# Altium PCB dc_cdi_cx500.PcbDoc (part 2 of 2)
Units mm, origin at the board's own origin, x right, y up, seen from the top; angles counter-clockwise.
Board outline 71.5 x 82.28 mm, 4 copper layers (Top, Power Plane, Ground Plane, Bottom), stack 1.586 mm thick; 164 components, 99 nets, 484 pads, 295 vias.
Unrouted connection lines stored in the file: 68.
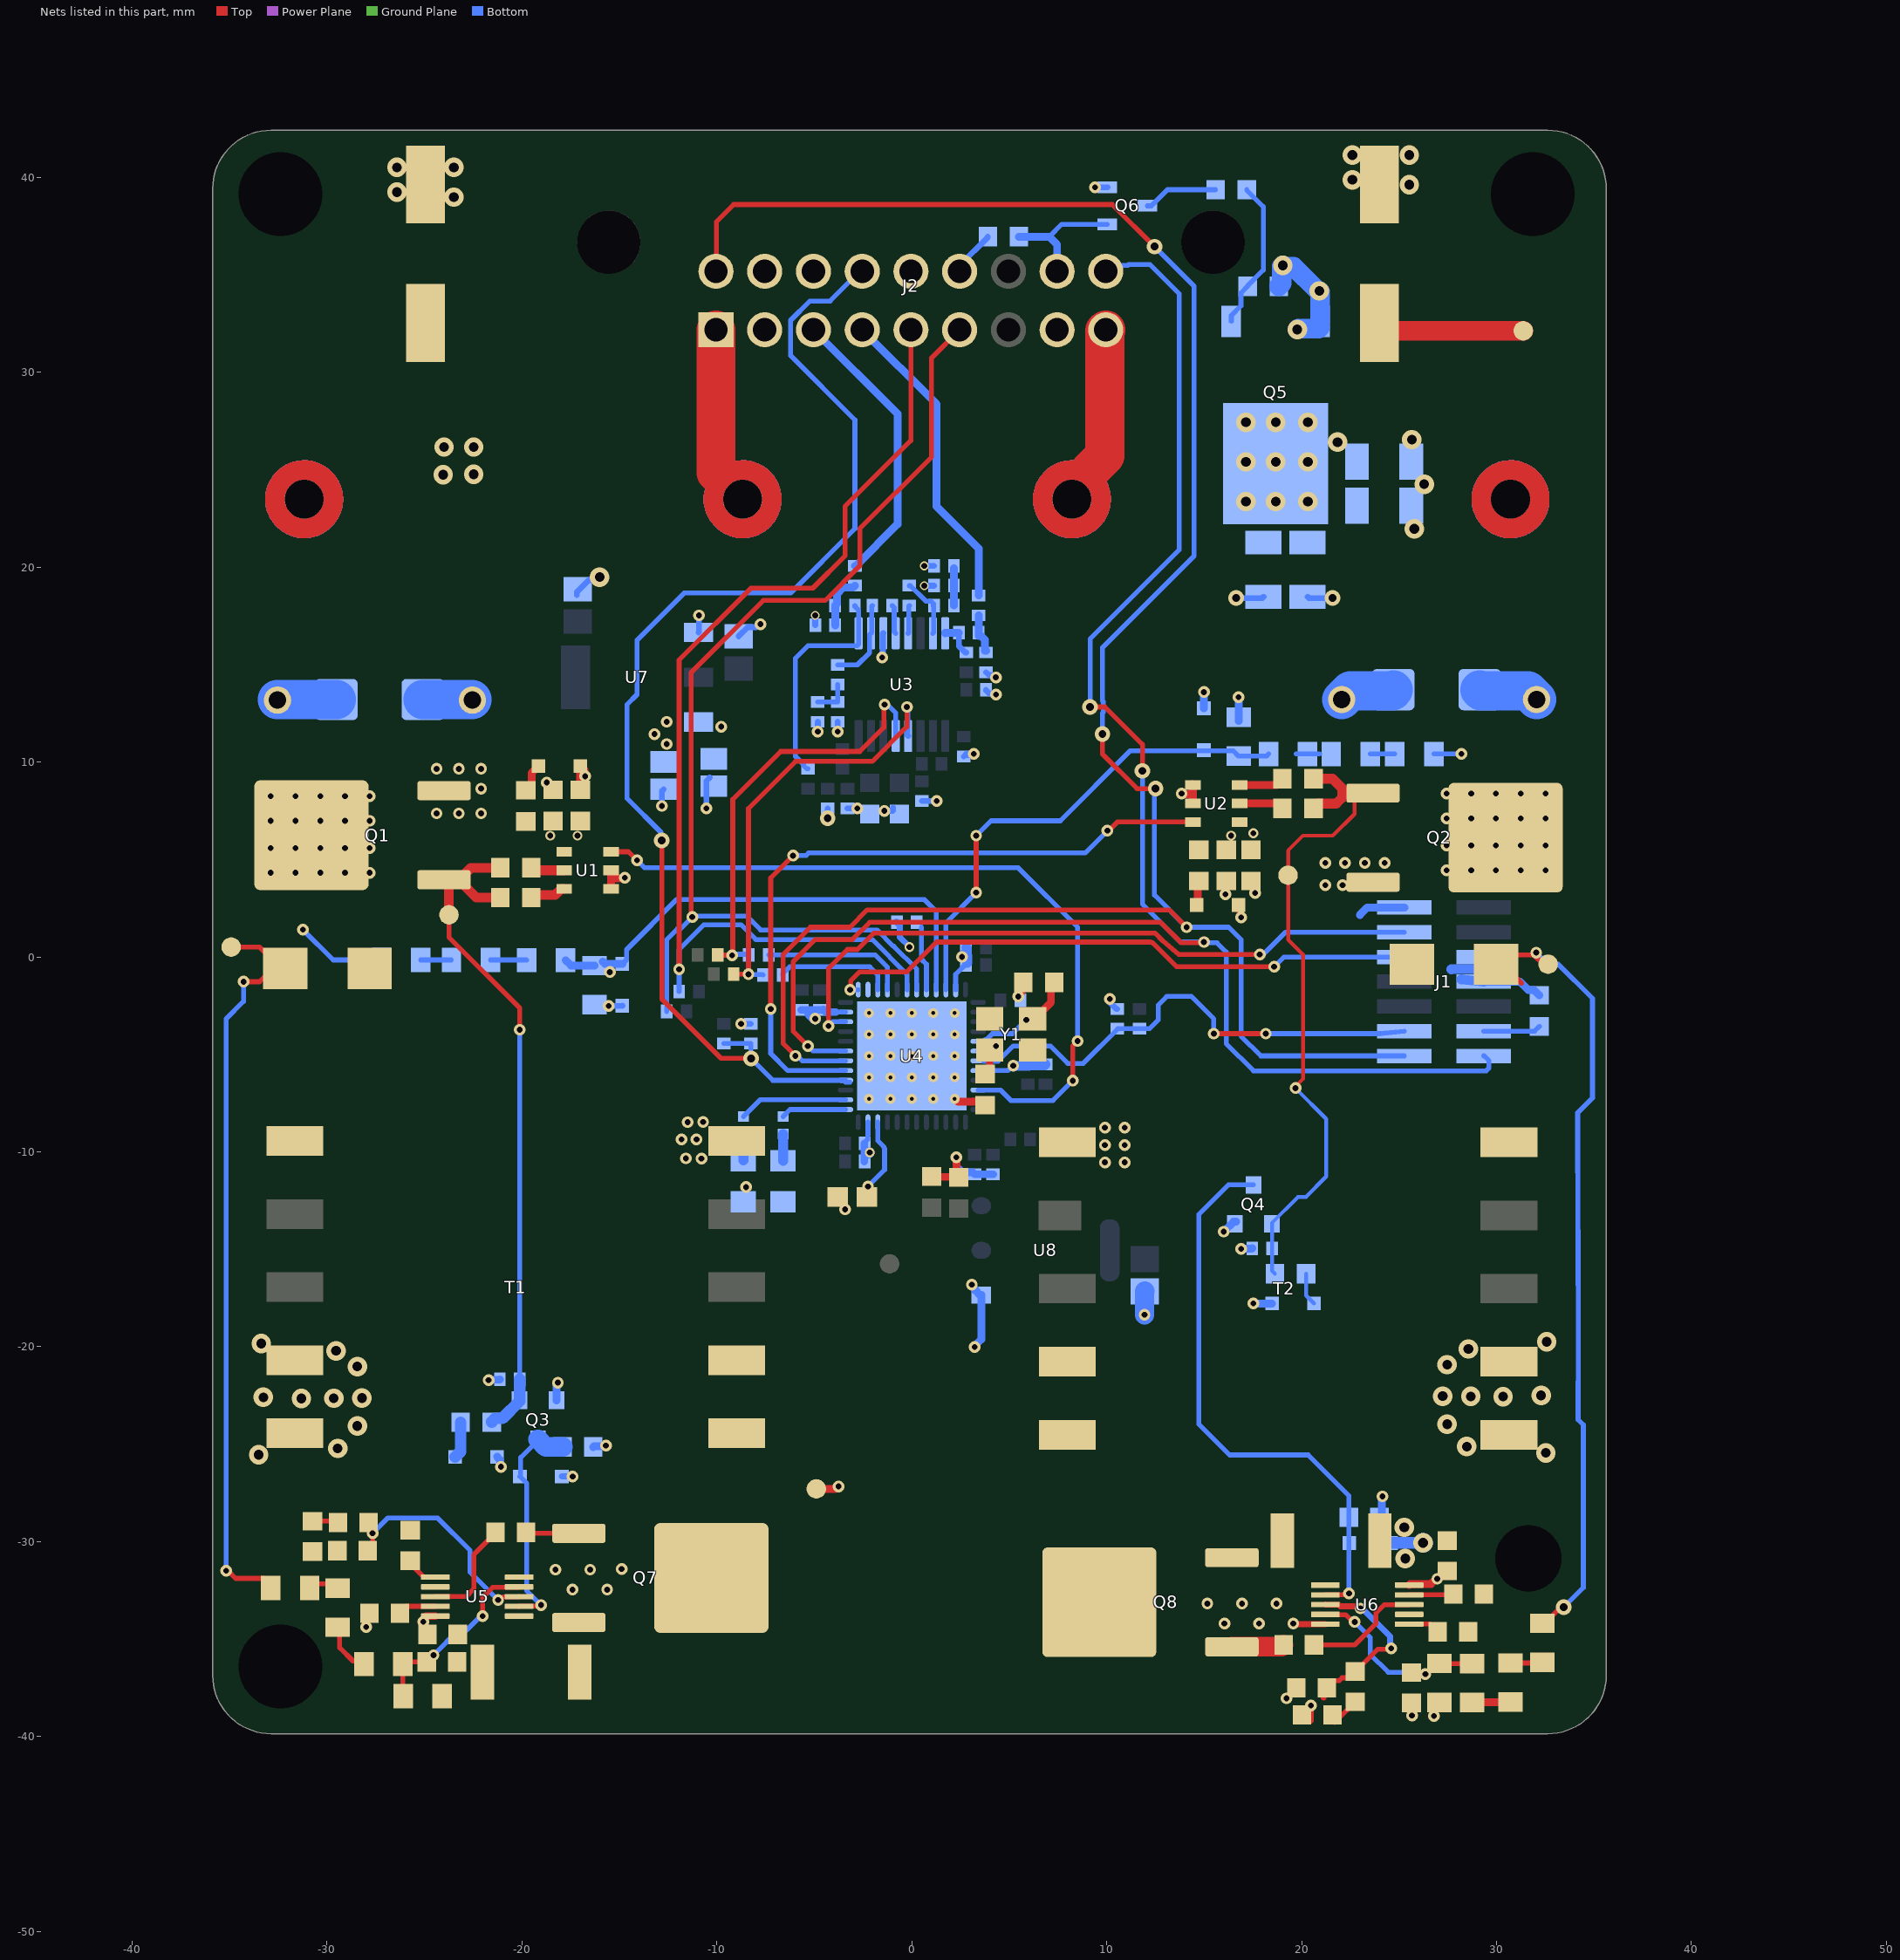
[diagram p4: the nets of this part, all layers, seen from the top]

## Via types
v1: diameter 0.6, hole 0.3, Top to Bottom, 194 vias
v2: diameter 1, hole 0.5, Top to Bottom, 54 vias
v3: diameter 0.5, hole 0.2, Top to Bottom, 25 vias
v4: diameter 0.8, hole 0.4, Top to Bottom, 11 vias
v5: diameter 0.5, hole 0.3, Top to Bottom, 7 vias
v6: diameter 0.45, hole 0.3, Top to Bottom, 3 vias
v7: diameter 0.55, hole 0.3, Top to Bottom, 1 vias

## Nets (pads, with @x,y where several pads share a name; then routed paths per layer and width w, separated by ;. In a path a pad name is that pad's centre, name@x,y a point inside that pad or via, vN(x,y) a via of type N, cw(c..) or ccw(c..) an arc to the next point about the centre after c; other vN are vias at no path point) (continued)
COMP_L: C42.1 R55.1 U5.3 | length 11.9
  Top w0.25: C42.1@-27.915,-30.468 -27.67,-30.223 v1(-27.67,-29.579) -27.67,-29.232 R55.1@-27.878,-29.024 ; v1(-21.228,-33.001) -21.133,-33.001 -20.972,-32.84 -20.164,-32.84 U5.3@-20.149,-32.825
  Bottom w0.25: v1(-27.67,-29.579) -26.88,-28.789 -24.331,-28.789 -22.662,-30.459 -22.662,-31.567 v1(-21.228,-33.001)
COMP_R: C48.1 R68.1 U6.3 | length 9
  Top w0.25: 21.114,-38.024 21.139,-38.024 ; C48.1@21.291,-37.509 21.556,-37.509 21.556,-37.224 21.641,-37.138 21.926,-37.138 22.073,-36.991 22.424,-36.991 R68.1@22.751,-36.664 ; C48.1@21.489,-37.674 C48.1@21.489,-37.575 ; R68.1@22.776,-36.664 23.917,-35.523 24.551,-35.523 v1(24.592,-35.481)
  Top w0.3: U6.3@21.216,-33.234 21.226,-33.244 21.904,-33.244 21.977,-33.317 22.902,-33.317 v1(23.018,-33.433)
  Bottom w0.3: v1(23.018,-33.433) 23.099,-33.433 24.535,-34.869 24.535,-35.424 v1(24.592,-35.481)
DGND: C22.1 C23.2 C24.2 C25.2 C26.2 C27.2 C28.2 C29.2 C30.2 C31.2 C32.2 C33.2 C34.2 C35.2 C36.2 C51.1 C52.2 C53.2 D5.2 D6.2 D7.1 D8.1 J1.2 J1.5 J1.7 pad.4@-4.899,-27.296 Q3.2 Q4.2 R9.2 R10.2 R31.2 R37.1 R41.2 RJ1.2 U4.8 U4.23 U4.35 U4.47 U4.49 U8.1 Y1.2 Y1.4 | length 41.8
  Top w0.4: pad.4@-4.899,-27.296 -3.937,-27.296 -3.81,-27.169 v1(-3.756,-27.169) ; C23.2@-3.798,-12.319 -3.473,-12.619 v1(-3.429,-12.954) ; C53.2@1.016,-11.265 1.039,-11.288 2.381,-11.288 C52.2@2.404,-11.311 2.286,-11.193 v1(2.286,-10.287) ; v3(2.2,-7.28) 2.227,-7.28 2.376,-7.429 C36.2@3.763,-7.429 ; Y1.4@3.996,-3.178 Y1.4@4.096,-3.178 ; v1(5.461,-2.032) ccw(c5.239,-1.699) 5.63,-1.781 cw(c6.556,-1.97) 5.719,-1.532 C35.2@5.887,-1.303
  Top w0.5: v1(5.201,-5.579) v1@5.22,-5.56 ; Y1.2@6.096,-4.778 Y1.2@6.196,-4.778
  Bottom w0.25: -3.91,-2.83 U4.35@-3.4,-2.83 ; C34.2@-2.46,-9.559 -2.265,-9.364 -2.265,-9.14 -2.234,-9.11 ; C34.2@-2.438,-9.585 C34.2@-2.412,-9.559 ; C33.2@-2.412,-10.494 C33.2@-2.386,-10.468 ; -2.25,-9.094 U4.23@-2.25,-8.48 ; U4.47@2.25,-1.68 2.25,-0.894 C30.2@2.843,-0.301 ; v1(2.575,0) 2.609,0.034 C31.2@2.609,0.263 ; U4.8@3.4,-5.83 4.846,-5.83 ccw(c4.846,-5.58) 5.023,-5.757 v1(5.201,-5.579)
  Bottom w0.3: v1(-8.763,-3.429) C28.2@-8.255,-3.429 ; R41.2@-0.799,1.815 -0.799,1.765 -0.612,1.578 -0.612,1.013 -0.127,0.528 v5(-0.127,0.508) ; v1(10.16,-2.159) 10.217,-2.216 10.217,-2.393 10.491,-2.667 C29.2@10.541,-2.667
  Bottom w0.4: v1(-21.717,-21.717) -21.696,-21.696 -21.158,-21.696 R9.2@-21.136,-21.674 ; D5.2@-21.277,-25.654 -21.127,-25.804 -21.127,-26.063 -21.082,-26.108 v1(-21.082,-26.162) ; Q3.2@-18.227,-22.749 -18.227,-21.91 v1(-18.161,-21.844) ; C25.2@-5.68,-2.717 C26.2@-4.713,-2.717 ; C26.2@-4.559,-2.71 -4.539,-2.71 -4.419,-2.83 -3.91,-2.83 ; C33.2@-2.438,-10.487 C34.2@-2.438,-9.585 ; v1(2.286,-10.287) 2.286,-10.74 2.602,-11.056 3.124,-11.056 C22.1@3.224,-11.156 R37.1@4.166,-11.156 ; v1(3.079,-16.822) 3.079,-16.876 3.261,-17.057 3.261,-17.112 U8.1@3.497,-17.348 ; v1(3.224,-20.018) 3.224,-19.964 3.563,-19.624 3.563,-17.414 U8.1@3.497,-17.348 ; U8.1@3.563,-17.348 U8.1@3.497,-17.348 ; v1(16.002,-14.097) 16.512,-13.587 Q4.2@16.64,-13.587 ; v1(16.891,-14.986) 16.905,-14.972 17.452,-14.972 R10.2@17.467,-14.957 ; v1(17.526,-17.78) D6.2@18.483,-17.78 ; 22.987,2.159 23.368,2.54 J1.2@25.27,2.54 ; J1.7@29.34,-1.27 31.203,-1.27 31.626,-1.693 31.92,-1.693 R31.2@32.195,-1.968
  Bottom w0.5: v5@-2.384,-10.09 -2.216,-10.09 v5(-2.159,-10.033) ; C31.2@2.784,0.488 2.834,0.438 2.834,0.071 2.843,0.061 C30.2@2.843,-0.301 ; v1@5.233,-5.592 6.008,-5.592 6.033,-5.567 6.808,-5.567 C27.2@6.858,-5.517 ; 27.686,-0.635 28.844,-0.628 ccw(c28.841,-0.128) 29.341,-0.126 29.341,-0.12 J1.5@29.34,0 ; J1.7@28.195,-1.15 J1.7@29.34,-1.27
  Bottom w0.6: -5.222,-2.908 v1(-4.958,-3.172)
  Bottom w1: v1(11.938,-18.36) 11.938,-17.174 C51.1@11.955,-17.157
  other v1: -8.509,-11.811
  other v3: -2.2,-7.28 -1.1,-7.28 0,-7.28 1.1,-7.28 -2.2,-6.18 -1.1,-6.18 0,-6.18 1.1,-6.18 2.2,-6.18 -2.2,-5.08 -1.1,-5.08 0,-5.08 1.1,-5.08 2.2,-5.08 -2.2,-3.98 -1.1,-3.98 0,-3.98 1.1,-3.98 2.2,-3.98 -2.2,-2.88 -1.1,-2.88 0,-2.88 1.1,-2.88 2.2,-2.88
EXT_SENSOR1_I2C_SCL: J2.5 R38.2 U4.42 | length 55.8
  Top w0.25: v1(-11.938,-0.635) -11.938,15.24 -8.255,18.923 -5.08,18.923 -3.429,20.574 -3.429,23.114 -0.047,26.496 J2.5@-0.047,32.179
  Bottom w0.25: R38.2@-11.938,-1.778 v1(-11.938,-0.635) -11.938,0.381 -10.668,1.651 -8.763,1.651 -8.001,0.889 -2.028,0.889 -0.25,-0.889 U4.42@-0.25,-1.68
EXT_SENSOR1_I2C_SDA: J2.6 R36.2 U4.43 | length 57
  Top w0.25: v1(-11.264,2.047) -11.328,2.111 -11.328,14.58 -7.62,18.288 -4.445,18.288 -2.667,20.066 -2.667,21.971 1.016,25.654 1.016,30.742 J2.6@2.453,32.179
  Bottom w0.25: R36.2@-12.573,-2.794 -12.573,0.889 -12.027,1.435 -11.877,1.435 v1(-11.264,2.047) ; v1@-11.339,2.123 -11.318,2.101 -8.481,2.101 -7.762,1.382 -1.782,1.382 -0.944,0.544 -0.925,0.544 0.25,-0.631 U4.43@0.25,-1.68
EXT_SENSOR3_SPI_NSS: U4.38
FLYBACK_EN_L: D10.1 Q3.3 R47.2 U5.2 | length 11.9
  Top w0.25: U5.2@-20.149,-33.325 -20.134,-33.31 -19.078,-33.31 v1(-19.025,-33.257)
  Bottom w0.25: D10.1@-20.108,-26.655 -19.753,-27.011 -19.753,-32.53 v1(-19.025,-33.257) ; D10.1@-20.066,-26.655 -20.066,-25.688 Q3.3@-19.177,-24.799
  Bottom w1: Q3.3@-19.177,-24.749 -18.778,-25.148 R47.2@-17.91,-25.148
FLYBACK_EN_R: D13.1 Q4.3 R60.2 U6.2 | length 29.7
  Top w0.25: U6.2@21.216,-32.734 21.231,-32.719 22.377,-32.719 v1(22.432,-32.663)
  Bottom w0.25: Q4.3@17.526,-11.7 16.24,-11.7 14.732,-13.208 14.732,-23.982 16.305,-25.555 20.337,-25.555 22.432,-27.65 v1(22.432,-32.663)
GND: C7.2 C8.2 C9.2 C10.2 C11.2 C12.2 C13.2 C14.2 C15.2 C16.1 C17.1 C18.2 C19.2 C20.2 C21.2 C49.2 C50.2 C54.2 C55.2 J2.2 J2.8 J2.14 J2.15 NT1.2 NT2.2 NT3.2 NT4.2 Q6.2 R12.2 R27.2 R28.2 R29.2 R34.1 RJ1.1 U3.11 U7.1 | length 20.3
  Bottom w0.3: C55.2@-17.192,18.577 -17.192,18.712 -16.567,19.337 -16.356,19.337 -16.206,19.487 v2(-16.017,19.487) ; v1(-12.827,7.747) -12.827,8.502 C50.2@-12.728,8.601 ; U7.1@-10.947,16.65 -10.922,16.675 v1(-10.922,17.526) ; v1(-10.541,7.62) -10.541,9.034 C49.2@-10.369,9.205 ; C54.2@-8.89,16.447 -8.413,16.924 -7.993,16.924 -7.843,17.074 v1(-7.762,17.074) ; C15.2@-4.953,17.018 v6(-4.953,17.526) ; v1(-4.826,11.557) R29.2@-4.826,12.065 ; v4(-4.318,7.112) C13.2@-4.318,7.62 ; v1(-3.81,11.557) C14.2@-3.81,12.065 ; R28.2@-3.302,7.62 v1(-2.794,7.62) ; v1(-1.524,15.367) -1.492,15.399 -1.492,16.593 U3.11@-1.46,16.625 ; v1(-1.407,7.496) -0.985,7.496 -0.96,7.521 C10.2@-0.96,7.653 ; R27.2@0.508,8.001 v1(1.27,8.001) ; v6(0.635,19.05) R12.2@1.143,19.05 ; v6(0.635,20.066) C9.2@1.143,20.066 ; J2.15@2.453,35.179 2.453,35.486 3.899,36.932 R34.1@3.899,36.957 ; C8.2@2.667,10.287 2.817,10.437 2.817,10.407 2.867,10.357 3.118,10.357 v1(3.175,10.414) ; C11.2@3.81,13.716 3.81,13.669 3.96,13.519 4.261,13.519 v1(4.318,13.462) ; C7.2@3.81,14.605 3.96,14.455 4.119,14.455 4.23,14.344 v1(4.311,14.344) ; v1(9.398,39.497) 9.401,39.494 10.031,39.494 Q6.2@10.033,39.492 ; v4(16.637,18.415) 17.981,18.415 C20.2@18.047,18.481 ; C21.2@20.307,18.481 20.372,18.415 v4(21.59,18.415)
  other v2: 25.781,21.971 26.289,24.257 25.654,26.543 -23.495,38.989 -26.416,39.243 25.527,39.624 22.606,39.878 -26.416,40.513 -23.495,40.513 22.606,41.148 25.527,41.148
HSE_OSC_IN: C35.1 U4.5 Y1.3 | length 5.3
  Top w0.25: Y1.3@6.196,-3.178 Y1.3@6.296,-3.178
  Top w0.4: Y1.3@6.296,-3.178 7.139,-2.335 C35.1@7.139,-1.303
  Bottom w0.25: U4.5@3.4,-4.33 3.675,-4.33 3.775,-4.23 3.847,-4.23 4.14,-3.937 5.165,-3.937 v1(5.873,-3.229)
HSE_OSC_OUT: C36.1 U4.6 Y1.1 | length 2.4
  Top w0.25: C36.1@3.763,-6.003 C36.1@3.996,-5.77
  Top w0.35: C36.1@3.996,-5.77 Y1.1@3.996,-4.778
  Bottom w0.25: U4.6@3.4,-4.83 4.136,-4.83 4.264,-4.702 ccw(c4.134,-4.572) v1(4.318,-4.572)
IGNT_TRIG_L: U1.6 U4.10 | length 39
  Top w0.25: U1.6@-15.437,5.395 -14.54,5.395 -14.098,4.953 v1(-14.097,4.953) ; v1(8.255,-6.35) 8.255,-4.572 v1(8.509,-4.318)
  Bottom w0.25: v1(-14.097,4.953) -13.716,4.572 5.461,4.572 8.509,1.524 v1(8.509,-4.318) ; U4.10@3.4,-6.83 4.544,-6.83 5.08,-7.366 7.239,-7.366 v1(8.255,-6.35)
IGNT_TRIG_R: U2.6 U4.29 | length 36.1
  Top w0.25: v1(-7.239,-2.667) -7.239,4.054 v1(-6.096,5.197) ; v1(10.033,6.477) 10.094,6.477 10.541,6.924 U2.6@14.421,6.924
  Bottom w0.25: v1(-7.239,-2.667) -7.239,-4.953 -6.362,-5.83 U4.29@-3.4,-5.83 ; v1(-6.096,5.197) -6.084,5.209 -5.421,5.209 -5.296,5.334 8.89,5.334 v1(10.033,6.477)
IN1+: R14.2 R22.2 U3.16 | length 1.9
  Bottom w0.3: R14.2@2.413,16.637 2.413,15.952 2.744,15.621 R22.2@2.794,15.621
  Bottom w0.4: U3.16@1.714,16.605 1.714,16.632 1.72,16.637 R14.2@2.413,16.637
IN1-: R18.2 R21.2 U3.15 | length 3.1
  Bottom w0.25: U3.15@1.079,16.605 1.111,16.637 R18.2@1.111,18.002
  Bottom w0.254: R21.2@-0.127,19.05 -0.077,19.05 0.716,18.257 0.97,18.257 1.111,18.116 R18.2@1.111,18.002
IN2+: R20.2 R25.2 U3.9 | length 11.6
  Bottom w0.25: R20.2@-5.334,9.652 -5.384,9.652 -5.559,9.827 -5.559,9.877 -5.969,10.287 -5.969,15.326 -5.334,15.961 -2.81,15.961 -2.73,16.041 U3.9@-2.73,16.605 -2.73,17.793 -2.921,17.984 R25.2@-2.921,18.034
IN2-: R19.2 R26.2 U3.10 | length 4.4
  Bottom w0.254: R26.2@-3.81,14.986 -2.794,14.986 -2.174,15.606 -2.174,16.527 U3.10@-2.095,16.605 -2.06,16.641 -2.06,17.992 R19.2@-2.024,18.028
ISEN_L: Q7.3 R52.1 U5.1
ISEN_R: Q8.3 R65.1 U6.1
KILL_SWITCH: C28.1 J2.13 R42.1 U4.28 | length 63.2
  Top w0.25: v4(-12.827,5.969) -12.827,-2.159 -9.779,-5.207 v4(-8.255,-5.207)
  Bottom w0.25: v4(-12.827,5.969) -12.867,6.009 -12.867,6.39 -14.605,8.128 -14.605,12.954 -14.097,13.462 -14.097,16.256 -11.684,18.669 -6.223,18.669 -2.921,21.971 -2.921,27.559 -6.222,30.86 -6.222,32.666 -5.233,33.655 -4.191,33.655 -2.667,35.179 J2.13@-2.547,35.179 ; R42.1@-9.652,-4.445 C28.1@-8.255,-4.445 v4(-8.255,-5.207) -7.132,-6.33 U4.28@-3.4,-6.33 ; U4.28@-3.4,-6.43 U4.28@-3.175,-6.43
L_COIL: C1.1 J2.1 | length 9.3
  Top w2: J2.1@-10.047,32.179 -10.047,24.853 C1.1@-8.679,23.485
L_COIL_MOSFET_GATE: pad.5@-23.749,2.159 Q1.1 Q3.1 R2.1 R3.1 R7.1 R9.1 | length 34.9
  Top w0.254: pad.5@-23.749,2.413 -23.749,1.016 -20.12,-2.613 v1@-20.12,-3.61
  Top w0.5: pad.5@-23.749,2.413 Q1.1@-23.749,3.949 ; R3.1@-21.12,3.048 -22.348,3.048 -23.249,3.949 -22.626,4.572 R2.1@-21.12,4.572
  Bottom w0.254: R9.1@-20.12,-21.674 v1(-20.12,-3.737)
  Bottom w0.6: R7.1@-21.552,-23.876 -21.552,-23.851 -21.377,-23.676 -21.004,-23.676 -20.127,-22.799 Q3.1@-20.127,-22.749 -20.127,-21.731 -20.12,-21.724 R9.1@-20.12,-21.674
L_FB: R56.1 U5.6 | length 1.8
  Top w0.25: R56.1@-25.887,-30.981 -25.044,-31.825 U5.6@-24.449,-31.825
L_HV: C1.2 C38.2 D2.1 D9.C pad.4@-34.925,0.508 Q1.2 R44.2 R45.2 | length 45.8
  Top w0.254: v1(-35.179,-31.496) -35.085,-31.496 -34.695,-31.887 -33.265,-31.887 -32.892,-32.26 R44.2@-32.892,-32.385 ; pad.4@-34.925,0.508 -33.465,0.508 -32.576,-0.381 -33.465,-1.27 v1(-34.29,-1.27)
  Bottom w0.254: v1(-35.179,-31.496) -35.179,-3.175 -34.29,-2.286 v1(-34.29,-1.27) ; v1(-31.242,1.397) -29.69,-0.155 R45.2@-27.201,-0.155
  Bottom w2: C38.2@-32.559,13.208 D2.1@-29.52,13.208
  other v1: -32.893,4.318 -31.623,4.318 -30.353,4.318 -29.083,4.318 -27.813,4.318 -32.893,5.588 -31.623,5.588 -30.353,5.588 -29.083,5.588 -27.813,5.588 -32.893,6.985 -31.623,6.985 -30.353,6.985 -29.083,6.985 -27.813,6.985 -32.893,8.255 -31.623,8.255 -30.353,8.255 -29.083,8.255 -27.813,8.255
L_HV_FB: C40.2 R50.1 R53.2 U5.4 | length 9.8
  Top w0.25: R53.2@-26.102,-37.923 -26.115,-37.91 R50.1@-26.115,-36.285 -26.006,-36.176 C40.2@-24.888,-36.176 v1(-24.538,-35.826) ; v1(-22.021,-33.827) -22.021,-32.863 -21.498,-32.34 -20.164,-32.34 U5.4@-20.149,-32.325
  Bottom w0.25: v1(-24.538,-35.826) -23.251,-34.539 -22.837,-34.539 -22.154,-33.856 -22.05,-33.856 v1(-22.021,-33.827)
LED1: R40.1 U4.25 | length 3.4
  Bottom w0.254: R40.1@-6.604,-8.186 -6.248,-7.83 U4.25@-3.4,-7.83
LED2: R39.1 U4.26 | length 5.6
  Bottom w0.254: R39.1@-8.636,-8.186 -7.78,-7.33 U4.26@-3.4,-7.33
LEFT_PULSE_3V3: R15.1 U4.39 | length 6
  Bottom w0.25: R15.1@-6.627,-0.92 -6.627,-0.87 -6.266,-0.508 -2.159,-0.508 -1.75,-0.917 U4.39@-1.75,-1.68
LEFT_PULSE_P: J2.4 R11.2 | length 16.1
  Bottom w0.4: J2.4@-2.547,32.179 1.27,28.362 1.27,23.114 3.429,20.955 R11.2@3.429,18.542
NetC23_1: C23.1 U4.22 | length 4.5
  Top w0.25: v1(-2.251,-11.776) -2.251,-11.782 -2.413,-11.944 C23.1@-2.181,-12.319
  Bottom w0.25: v1(-2.251,-11.776) -1.397,-10.922 -1.397,-9.883 ccw(c-1.647,-9.883) -1.47,-9.706 -1.75,-9.426 U4.22@-1.75,-8.48
NetC39_2: C39.2 U5.9 | length 2
  Top w0.254: C39.2@-26.265,-33.679 -26.265,-33.673 -25.917,-33.325 U5.9@-24.449,-33.325
NetC41_1: C41.1 R55.2 | length 1.3
  Top w0.25: C41.1@-30.746,-28.952 -29.513,-28.952 R55.2@-29.44,-29.024
NetC45_2: C45.2 U6.9 | length 2.5
  Top w0.25: U6.9@25.516,-32.734 28.02,-32.734 C45.2@28.051,-32.703
NetC47_1: C47.1 R68.2 | length 1.5
  Top w0.25: C47.1@21.696,-39.281 22.376,-38.601 22.376,-38.576 22.726,-38.226 R68.2@22.751,-38.226
NetD1_1: D1.1 R1.1 | length 1.3
  Top w0.4: D1.1@14.614,2.667 14.673,2.726 14.673,3.84 R1.1@14.732,3.899
NetD3_1: D3.1 R4.1 | length 1.5
  Top w0.4: R4.1@-19.812,8.547 -19.787,8.547 -19.512,8.822 -19.512,9.435 D3.1@-19.151,9.796
NetD5_1: D5.1 R7.2 | length 1.9
  Bottom w0.6: D5.1@-23.427,-25.654 -23.152,-25.379 R7.2@-23.152,-23.876
NetD6_1: D6.1 R8.2 | length 1.7
  Bottom w0.2: R8.2@20.231,-16.256 20.231,-17.378 D6.1@20.633,-17.78
NetD7_2: D7.2 R39.2 | length 1.4
  Bottom w0.5: D7.2@-8.636,-10.437 R39.2@-8.636,-9.086
NetD8_2: D8.2 R40.2 | length 1.4
  Bottom w0.5: D8.2@-6.604,-10.459 R40.2@-6.604,-9.086
NetD9_A: D9.A T1.1
NetD11_1: D11.1 R51.1 R54.2 U4.45 | length 24.7
  Bottom w0.254: D11.1@-14.853,-0.356 -14.638,-0.141 -14.638,0.375 -12.068,2.944 0.642,2.944 1.25,2.336 U4.45@1.25,-1.68
  Bottom w0.4: R51.1@-17.768,-0.166 -17.49,-0.444 R54.2@-16.286,-0.444 ; R54.2@-15.851,-0.242 -15.737,-0.356 D11.1@-14.853,-0.356
  other v1: -15.494,-0.778
NetD12_A: D12.A T2.10
NetD14_1: D14.1 R64.1 R67.2 U4.46 | length 25.4
  Top w0.25: v1(3.302,3.302) v1(3.302,6.223)
  Bottom w0.25: U4.46@1.75,-1.68 1.75,1.75 v1(3.302,3.302) ; v1(3.302,6.223) 4.064,6.985 7.62,6.985 11.214,10.579 14.986,10.579 15.289,10.579 16.488,10.579 R67.2@16.764,10.303 ; R67.2@16.828,10.303 18.193,10.303 R64.1@18.304,10.414
NetJ1_11: J1.11 R31.1 | length 3
  Bottom w0.25: J1.11@29.34,-3.81 31.953,-3.81 R31.1@32.195,-3.568
NetQ5_1: Q5.1 R32.1 R33.2 | length 7.8
  Bottom w0.254: Q5.1@16.389,32.613 16.389,32.913 16.886,33.41 16.886,34.069 R32.1@17.234,34.417 17.234,34.442 18.034,35.242 18.034,38.494 17.183,39.345 R33.2@17.183,39.37
NetQ6_3: Q6.3 R33.1 | length 3.8
  Bottom w0.254: Q6.3@12.083,38.542 12.283,38.542 13.111,39.37 R33.1@15.583,39.37
NetQ7_1: Q7.1 R46.2 | length 2.7
  Top w0.254: R46.2@-19.798,-29.525 -19.744,-29.579 Q7.1@-17.084,-29.579
NetQ7_2: Q7.2 T1.6 T1.7
NetQ8_1: Q8.1 R59.2 | length 2.7
  Top w1: Q8.1@16.422,-35.398 18.978,-35.398 R59.2@19.076,-35.301
NetQ8_2: Q8.2 T2.4 T2.5
NetR2_2: R2.2 U1.2 | length 1.7
  Top w0.5: R2.2@-19.52,4.572 -19.393,4.445 U1.2@-17.837,4.445
NetR3_2: R3.2 U1.3 | length 1.9
  Top w0.5: R3.2@-19.52,3.048 -19.393,3.175 -18.307,3.175 -17.987,3.495 U1.3@-17.837,3.495
NetR5_2: R5.2 U2.2 | length 2.3
  Top w0.4: U2.2@16.821,7.874 18.758,7.874 R5.2@19.012,7.62
NetR6_2: R6.2 U2.3 | length 2.3
  Top w0.4: U2.3@16.821,8.824 18.717,8.824 19.012,9.119 R6.2@19.012,9.144
NetR13_2: R13.2 R15.2 U3.4 | length 22.4
  Top w0.25: R13.2@-9.144,-0.889 v1(-8.382,-0.889) -8.382,7.62 -5.969,10.033 -2.032,10.033 -0.254,11.811 v1(-0.254,12.827)
  Bottom w0.25: v1(-8.382,-0.889) -8.367,-0.904 -7.658,-0.904 R15.2@-7.643,-0.92
  Bottom w0.3: v1(-0.254,12.827) -0.222,12.795 -0.222,11.367 U3.4@-0.191,11.335
NetR16_2: R16.2 R17.2 U3.5 | length 21.8
  Top w0.25: R17.2@-9.966,0.099 -9.959,0.092 -9.225,0.092 v1(-9.218,0.085) -9.188,0.115 -9.188,8.084 -6.731,10.541 -2.667,10.541 -1.437,11.771 -1.437,12.914 v1(-1.397,12.954)
  Bottom w0.25: v1(-9.218,0.085) -9.166,0.136 R16.2@-8.58,0.136 ; v1(-1.397,12.954) -1.33,12.887 -1.198,12.887 -0.826,12.515 U3.5@-0.826,11.335
NetR41_1: R41.1 U4.44 | length 3.3
  Bottom w0.25: 0.495,-0.119 R41.1@0.495,1.524
  Bottom w0.254: 0.495,-0.119 0.75,-0.374 U4.44@0.75,-1.68
NetR44_1: R44.1 R48.2 | length 1.6
  Top w0.25: R44.1@-30.892,-32.385 -30.675,-32.168 -29.69,-32.168 R48.2@-29.462,-32.396
NetR45_1: R45.1 R49.2 | length 1.6
  Bottom w0.25: R45.1@-25.201,-0.155 R49.2@-23.625,-0.155
NetR46_1: R46.1 U5.8 | length 5.5
  Top w0.25: U5.8@-24.449,-32.825 -22.868,-32.825 -22.478,-32.434 -22.478,-30.668 -21.36,-29.55 R46.1@-21.36,-29.525
NetR48_1: R48.1 R50.2 | length 3
  Top w0.254: R48.1@-29.356,-34.069 -29.356,-35.444 -28.669,-36.13 -28.27,-36.13 R50.2@-28.115,-36.285
NetR49_1: R49.1 R51.2 | length 1.9
  Bottom w0.254: R49.1@-21.625,-0.155 -19.778,-0.155 R51.2@-19.768,-0.166
NetR57_1: R57.1 R61.2 | length 1.6
  Top w0.25: R61.2@30.71,-36.231 32.305,-36.231 R57.1@32.34,-36.196
NetR58_1: R58.1 R62.2 | length 1.3
  Bottom w0.25: R62.2@23.517,10.414 R58.1@24.781,10.414
NetR59_1: R59.1 U6.8 | length 6.1
  Top w0.25: R59.1@20.638,-35.301 22.719,-35.301 23.804,-34.216 23.804,-33.673 24.243,-33.234 U6.8@25.516,-33.234
NetR61_1: R61.1 R63.2 | length 2
  Top w0.4: R63.2@28.743,-38.258 28.756,-38.245 30.697,-38.245 R61.1@30.71,-38.231
NetR62_1: R62.1 R64.2 | length 1.2
  Bottom w0.254: 19.723,10.414 20.917,10.414
NRST: C29.1 J1.12 R43.1 U4.7 | length 25.4
  Top w0.25: v1(15.494,-3.937) v1(18.161,-3.937)
  Bottom w0.25: U4.7@3.699,-5.352 4.427,-5.352 5.207,-4.572 7.112,-4.572 7.784,-5.244 8.001,-5.461 8.794,-5.461 10.572,-3.683 12.192,-3.683 12.636,-3.238 12.636,-2.476 13.081,-2.032 14.351,-2.032 15.494,-3.175 v1(15.494,-3.937) ; v1(18.161,-3.937) 24,-3.937 J1.12@25.27,-3.81
OUT1: R21.1 U3.13 | length 1.5
  Bottom w0.254: U3.13@-0.191,16.605 -0.159,16.637 -0.159,18.002 R21.1@-0.127,18.034
OUT2: R19.1 U3.12 | length 1.5
  Bottom w0.254: R19.1@-1.008,18.028 -0.908,17.928 -0.908,17.447 -0.904,17.442 -0.904,16.683 U3.12@-0.826,16.605
PGND: C2.2 C3.2 C4.2 C5.2 C37.2 C38.1 C39.1 C40.1 C41.2 C42.2 C43.2 C44.1 C45.1 C46.1 C47.2 C48.2 D1.2 D2.2 D3.2 D4.2 D10.2 D11.2 D13.2 D14.2 NT1.1 NT2.1 NT3.1 NT4.1 Q1.3 Q2.3 R52.2 R53.1 R54.1 R56.2 R65.2 R66.1 R67.1 R69.2 T1.10 T2.1 U1.4 U1.5 U2.4 U2.5 U5.5 U5.7 U6.5 U6.7 | length 22.8
  Top w0.3: v1(-27.99,-34.386) -27.99,-33.842 C39.1@-27.827,-33.679 ; v1(19.227,-38.043) 19.227,-38.036 19.729,-37.534 C48.2@19.729,-37.509 ; v1(19.57,-34.207) 19.596,-34.234 U6.5@21.216,-34.234 ; C47.2@20.472,-39.184 v1(20.472,-38.411) ; C46.1@25.635,-38.282 25.661,-38.307 v1(25.661,-38.923) ; v1(26.784,-38.948) 26.784,-38.549 R66.1@27.077,-38.255
  Top w0.4: C2.2@-18.409,8.569 C2.2@-18.334,8.644 ; v1@-17.015,9.395 -17.015,8.572 C3.2@-17.012,8.569 ; D3.2@-17.001,9.796 -16.802,9.597 -16.802,9.309 v1(-16.764,9.271) ; U1.4@-15.437,3.495 -15.437,3.97 ; U1.5@-15.437,4.445 -15.437,3.97 ; v1(-14.732,4.064) -14.77,4.026 -15.381,4.026 -15.437,3.97 ; v1(13.843,8.382) 13.881,8.344 14.332,8.344 14.421,8.255 ; U2.4@14.371,8.874 U2.4@14.421,8.824 14.421,8.255 ; U2.5@14.421,7.874 14.421,8.255 ; v1(16.092,3.212) 16.11,3.231 16.11,3.624 16.129,3.643 C4.2@16.129,3.899 ; D1.2@16.764,2.667 16.853,2.578 16.853,2.07 v1(16.891,2.032) ; C5.2@17.399,3.899 17.399,3.798 17.573,3.624 17.573,3.323 v1(17.611,3.284)
  Bottom w0.3: D10.2@-17.958,-26.655 -17.957,-26.656 -17.406,-26.656 v1(-17.404,-26.658) ; v1(-15.547,-2.512) -15.545,-2.509 -14.856,-2.509 D11.2@-14.853,-2.506
  Bottom w0.4: D14.2@14.986,12.759 v1(14.986,13.589) ; R67.1@16.764,12.103 v1(16.764,13.335)
  Bottom w0.6: D13.2@24.59,-30.073 v2@26.226,-30.073
  Bottom w1: v2@26.226,-30.073 v2(26.23,-30.068)
  Bottom w2: D2.2@-25.09,13.208 C38.1@-22.559,13.208 ; C44.1@22.055,13.208 22.503,13.656 24.649,13.656 D4.2@24.709,13.716
  other v1: 16.039,-34.207 17.818,-34.207 15.164,-33.184 16.943,-33.184 18.715,-33.184 -17.41,-32.466 -15.631,-32.466 -18.285,-31.443 -16.506,-31.443 -14.89,-31.409 9.906,-10.541 10.922,-10.541 -11.599,-10.336 -10.794,-10.343 9.906,-9.652 10.922,-9.652 -11.811,-9.369 -11.049,-9.369 9.906,-8.763 10.922,-8.763 -11.499,-8.48 -10.708,-8.467 21.209,3.683 22.098,3.683 21.209,4.826 22.225,4.826 23.241,4.826 24.257,4.826 -24.384,7.366 -23.241,7.366 -22.098,7.366 -22.098,8.636 -18.728,8.951 -24.384,9.652 -23.241,9.652 -22.098,9.652
  other v2: 25.315,-30.867 25.268,-29.27
POWER_ON: J2.17 Q6.1 R34.2 | length 6.7
  Bottom w0.254: 7.052,36.957 7.687,37.592 Q6.1@10.033,37.592
  Bottom w0.4: R34.2@5.499,36.957 7.052,36.957 7.453,36.556 J2.17@7.453,35.179
R_COIL: C6.1 J2.9 | length 9.4
  Top w2: C6.1@8.217,23.485 8.217,24.026 9.906,25.715 9.906,32.132 J2.9@9.953,32.179
R_COIL_MOSFET_GATE: pad.5@19.304,4.191 Q2.1 Q4.1 R5.1 R6.1 R8.1 R10.1 | length 35.2
  Top w0.2: v1(19.685,-6.731) 19.685,-6.644 20.066,-6.263 20.066,0.127 19.304,0.889 pad.5@19.304,4.191 19.304,5.461 20.066,6.223 21.6,6.223 22.711,7.335 22.711,8.003 Q2.1@23.211,8.503
  Top w0.5: R5.1@20.612,7.62 20.612,7.645 20.837,7.87 21.789,7.87 22.081,8.163 22.081,8.653 21.59,9.144 R6.1@20.612,9.144 ; 22.081,8.503 23.211,8.503 Q2.1@23.622,8.503
  Bottom w0.2: Q4.1@18.476,-13.7 18.476,-14.95 R10.1@18.483,-14.957 18.483,-16.108 R8.1@18.631,-16.256 ; Q4.1@18.476,-13.65 19.815,-12.311 20.223,-12.311 21.262,-11.272 21.262,-8.308 v1(19.685,-6.731)
R_FB: R69.1 U6.6 | length 1.6
  Top w0.25: U6.6@25.516,-34.234 26.612,-34.234 26.977,-34.6 R69.1@26.977,-34.625
R_HV: C6.2 C44.2 D4.1 D12.C pad.4@32.645,-0.374 Q2.2 R57.2 R58.2 | length 46.5
  Top w0.254: D12.C@30.164,-0.381 D12.C@30.314,-0.381 ; 31.287,-1.354 D12.C@30.314,-0.381 ; v1(32.035,0.223) v1@31.914,0.102 ; R57.2@32.196,-33.961 32.838,-33.823 33.185,-33.476 33.337,-33.476 v4(33.441,-33.372) ; pad.4@32.645,-0.374 32.397,-0.381 v1@31.914,0.102 ; D12.C@30.314,-0.381 30.797,0.102 v1@31.914,0.102
  Bottom w0.254: R58.2@26.781,10.414 v1(28.194,10.414) v1@28.194,10.508 ; v1(32.035,0.223) 32.624,-0.366 33.162,-0.366 34.925,-2.129 34.925,-7.239 34.237,-7.927 34.163,-8.001 34.163,-8.211 34.202,-19.743 cw(c32.575,-19.749) 34.202,-19.757 34.181,-23.746 34.45,-24.015 34.45,-32.363 v4(33.441,-33.372)
  Bottom w2: D4.1@29.139,13.716 29.199,13.656 31.607,13.656 C44.2@32.055,13.208
  other v1: 27.432,4.445 28.702,4.445 29.972,4.445 31.242,4.445 32.512,4.445 27.432,5.715 28.702,5.715 29.972,5.715 31.242,5.715 32.512,5.715 27.432,7.112 28.702,7.112 29.972,7.112 31.242,7.112 32.512,7.112 27.432,8.382 28.702,8.382 29.972,8.382 31.242,8.382 32.512,8.382
R_HV_FB: C46.2 R63.1 R66.2 U6.4 | length 10.3
  Top w0.25: U6.4@21.216,-33.734 21.231,-33.749 22.255,-33.749 22.628,-34.123 v1(22.723,-34.123) ; C46.2@25.635,-36.72 25.714,-36.799 v1(26.349,-36.799) 26.408,-36.799 26.952,-36.255 R66.2@27.077,-36.255 28.74,-36.255 R63.1@28.743,-36.258
  Bottom w0.25: v1(22.723,-34.123) 23.517,-34.917 23.517,-35.777 24.444,-36.703 25.619,-36.703 25.714,-36.799 v1(26.349,-36.799)
RIGHT_PULSE_3V3: R16.1 U4.40 | length 7.5
  Bottom w0.25: R16.1@-7.346,0.099 -1.877,0.099 -1.25,-0.528 U4.40@-1.25,-1.68
RIGHT_PULSE_P: J2.3 R30.2 | length 14.8
  Bottom w0.4: J2.3@-5.047,32.179 -0.733,27.865 -0.733,22.204 -2.871,20.066 R30.2@-2.921,20.066
SWCLK: J1.6 U4.37 | length 31
  Top w0.25: v1(-3.166,-1.687) -3.137,-1.658 -3.137,-1.232 -2.667,-0.762 -0.254,-0.762 1.27,0.762 12.215,0.762 ; v1(18.589,-0.508) 13.589,-0.508 12.392,0.689 ; 12.215,0.762 cw(c12.215,0.512) 12.392,0.689 ; 12.215,0.762 cw(c12.215,0.512) 12.392,0.689
  Bottom w0.25: v1(-3.166,-1.687) U4.37@-2.75,-1.68 ; v1(18.589,-0.508) 19.097,0 J1.6@25.27,0
SWDIO: J1.4 U4.34 | length 35.1
  Top w0.25: v1(-4.279,-3.549) -4.279,-0.596 -3.302,0.381 -2.794,0.381 -1.945,1.23 12.476,1.23 12.891,0.815 13.698,0.127 13.802,0.127 v1(17.851,0.127)
  Bottom w0.25: v1(-4.279,-3.549) -4.06,-3.33 U4.34@-3.4,-3.33 ; v1(17.851,0.127) 17.918,0.194 18.101,0.194 19.177,1.27 J1.4@25.27,1.27
UART_DEBUG_RX: J1.13 J2.18 U4.31 | length 93.2
  Top w0.25: v1(-5.334,-4.572) -6.096,-3.81 -6.096,-0.254 -4.953,0.889 -3.048,0.889 -2.159,1.778 12.765,1.778 13.812,0.731 14.955,0.731 v1(14.986,0.762) ; v4(9.144,12.827) 9.906,12.827 11.833,10.9 v4(11.833,9.547)
  Bottom w0.25: v1(-5.334,-4.572) -5.076,-4.83 U4.31@-3.4,-4.83 ; v4(9.144,12.827) 9.144,16.314 13.716,20.886 13.716,34.036 12.226,35.526 11.131,35.526 11.081,35.476 10.25,35.476 J2.18@9.953,35.179 ; v4(11.833,9.547) 11.833,2.711 13.781,0.762 v1(14.986,0.762) 15.026,0.722 15.661,0.722 16.129,0.254 16.129,-4.445 17.526,-5.842 29.468,-5.842 29.614,-5.696 29.614,-5.325 29.369,-5.08 J1.13@29.34,-5.08
UART_DEBUG_TX: J1.14 J2.10 U4.30 | length 113.4
  Top w0.25: J2.10@-10.047,35.179 -10.033,35.193 -10.033,37.719 -9.144,38.608 10.287,38.608 v4(12.446,36.449) ; v1(-5.969,-5.08) -6.6,-4.449 -6.6,0.131 -5.207,1.524 -3.175,1.524 -2.286,2.413 13.208,2.413 v1(14.097,1.524) ; v4(9.779,11.43) 9.779,10.414 11.557,8.636 v4(12.508,8.636)
  Bottom w0.25: v1(-5.969,-5.08) -5.874,-5.08 -5.624,-5.33 U4.30@-3.4,-5.33 ; v4(9.779,11.43) 9.779,12.507 9.819,12.547 9.819,13.107 9.779,13.147 9.779,15.875 14.478,20.574 14.478,34.417 v4(12.446,36.449) ; v4(12.508,8.636) 12.446,8.574 12.446,3.175 v1(14.097,1.524) 16.256,1.524 16.891,0.889 16.891,-4.064 17.907,-5.08 J1.14@25.27,-5.08
VBAT: C2.1 C3.1 C4.1 C5.1 C16.2 C17.2 C18.1 C19.1 C20.1 C21.1 C37.1 C43.1 C49.1 C50.1 pad.4@31.369,32.131 Q5.3 R1.2 R4.2 R47.1 R60.1 T1.4 T1.5 T2.6 T2.7 U1.1 U2.1 U5.10 U6.10 U7.3 | length 13.2
  Top w0.4: C37.1@-24.858,-34.767 -25.021,-34.604 -25.021,-34.16 v1(-25.059,-34.122) -25.021,-34.084 -25.021,-33.922 -24.924,-33.825 U5.10@-24.449,-33.825 ; U6.10@25.516,-32.234 25.576,-32.174 26.641,-32.174 26.903,-31.912 v1(26.957,-31.912) 26.995,-31.874 27.085,-31.874 27.445,-31.514 C43.1@27.47,-31.514
  Top w1: C17.2@23.994,32.535 24.398,32.131 pad.4@31.369,32.131
  Bottom w0.4: R47.1@-16.348,-25.148 -16.314,-25.114 -15.729,-25.114 v1(-15.695,-25.08) ; R60.1@23.991,-28.758 24.107,-28.641 24.107,-27.718 v1(24.146,-27.679)
  other v1: -12.573,10.922 -13.208,11.435 -9.779,11.816 -12.573,12.065
  other v2: -33.511,-25.54 32.527,-25.448 -29.457,-25.218 28.473,-25.126 -28.45,-24.066 27.466,-23.974 -31.317,-22.655 -29.659,-22.643 -28.217,-22.631 -33.272,-22.595 28.676,-22.551 30.333,-22.563 27.233,-22.539 32.289,-22.503 -28.45,-21.018 27.466,-20.926 -29.54,-20.211 28.557,-20.118 -33.382,-19.839 32.575,-19.749 17.145,23.368 18.669,23.368 20.32,23.368 -24.048,24.745 -22.479,24.765 17.145,25.4 18.669,25.4 20.32,25.4 -24.003,26.162 -22.479,26.162 21.844,26.416 17.145,27.432 18.669,27.432 20.32,27.432
  other v5: -18.55,6.22 -17.153,6.22 16.383,6.223 17.526,6.35
VBAT_0: J2.11 J2.12 Q5.2 R32.2 | length 6.4
  Bottom w1: R32.2@18.834,34.417 18.981,34.564 18.981,35.429 v2(19.033,35.481) 19.085,35.429 19.58,35.429 20.835,34.174 v2(20.908,34.174) 20.949,34.133 Q5.2@20.949,32.613 ; v2(19.776,32.192) 19.828,32.244 20.88,32.244 Q5.2@20.949,32.313
VR_SENSOR_IN1+: C7.1 R11.1 R14.1 | length 2.2
  Bottom w0.4: R14.1@3.429,16.465 R11.1@3.429,17.526 ; R14.1@3.429,16.637 3.429,16.587 3.743,16.273 3.743,15.721 3.752,15.712 C7.1@3.81,15.712
VR_SENSOR_IN1-: C9.1 R12.1 R18.1 | length 1.8
  Bottom w0.4: R18.1@2.159,18.034 R12.1@2.159,18.923 ; R12.1@2.159,19.05 C9.1@2.159,19.939
VR_SENSOR_IN2+: C15.1 R25.1 R30.1 | length 2.8
  Bottom w0.4: C15.1@-3.937,17.018 R25.1@-3.937,18.034 -3.837,18.134 -3.837,18.642 -3.529,18.95 -3.021,18.95 R30.1@-2.921,19.05
VR_SENSOR_IN2-: C14.1 R26.1 R29.1 | length 1.9
  Bottom w0.25: R29.1@-4.826,13.081 C14.1@-3.81,13.081 R26.1@-3.81,13.97
pads on no net: J1.1 J1.8 J1.9 J1.10 J2. T1.2 T1.3 T1.8 T1.9 T2.2 T2.3 T2.8 T2.9 U3.2 U3.7 U4.2 U4.3 U4.4 U4.11 U4.13 U4.15 U4.18 U4.19 U4.20 U4.21 U4.27 U4.32 U4.33 U4.41

## Polygon pours and split planes (outlines as drawn)
PGND on Top "DGND_PLANE" (solid, shelved, pour order 77): -35.941,42.418 -35.941,-42.418 35.559,-42.418 35.559,42.418
VBAT on Power Plane "VBAT_POUR" (solid, shelved, pour order 76): -42.245,28.829 -42.245,-42.418 44.75,-42.418 44.75,28.829
5V0 on Power Plane "5v0_plane" (solid, shelved, pour order 75): -19.321,15.748 -19.321,13.064 -18.431,12.175 -14.986,12.175 -13.286,13.413 -5.041,13.285 -3.937,12.175 3.175,12.175 4.699,10.541 4.699,2.667 6.173,1.193 6.173,-10.491 4.699,-11.965 2.856,-11.965 2.571,-12.25 2.571,-12.923 2.856,-13.208 5.715,-13.208 7.747,-11.176 7.747,1.857 6.604,3.515 6.604,13.82 3.97,16.454 -18.431,16.454
VBAT_0 on Power Plane "VBAT_0_POUR" (solid, shelved, pour order 79): -42.672,41.148 44.704,41.148 44.704,30.734 -42.799,30.734
PGND on Ground Plane "PGND_R" (solid, shelved, pour order 82): 15.641,7.62 14.732,6.681 14.732,-27.432 12.573,-29.591 12.573,-48.514 39.901,-48.514 39.703,5.001 37.084,7.62
DGND on Ground Plane "GND_00" (solid, shelved, pour order 81): -11.357,6.604 -13.97,3.991 -13.97,1.016 -13.97,-26.289 -10.414,-29.845 10.414,-29.845 13.335,-26.924 13.335,1.27 13.335,2.667 9.398,6.604
GND on Ground Plane "GND_00" (solid, shelved, pour order 80): -37.211,35.179 -16.51,35.179 -16.51,5.08 -15.875,4.445 -14.732,4.445 -11.684,7.493 10.089,7.493 13.589,3.985 13.589,8.763 36.703,8.763 36.703,35.106 36.703,46.101 -37.211,46.101
PGND on Ground Plane "PGND_L" (solid, shelved, pour order 85): -40.645,-34.798 -40.645,-47.62 -29.591,-47.62 -23.876,-47.62 -13.34,-47.62 -13.34,-41.788 -13.34,-29.464 -15.24,-27.564 -15.24,1.524 -17.78,4.064 -17.78,34.036 -36.481,34.036 -40.645,29.27
PGND on Ground Plane "PGND_BOT" (solid, shelved, pour order 84): -14.605,-30.699 13.589,-30.699 13.589,-45.593 -14.605,-45.593
DGND on Bottom "bot-GND_PLANE" (solid, shelved, pour order 78): -36.016,43.576 35.497,43.576 35.497,-43.673 -36.219,-43.673

## Keep-outs
Keep-Out Layer:
  region: -11.557,33.909 -12.446,33.02 -12.446,21.336 -11.176,20.066 -6.35,20.066 -6.35,20.193 -5.207,21.336 -5.207,27.559 -8.636,30.988 -8.636,33.909
  region: 11.43,34.163 12.319,33.274 12.319,21.59 11.049,20.32 6.223,20.32 6.223,20.447 5.08,21.59 5.08,27.813 8.509,31.242 8.509,34.163

## Other copper
Top:
  region net ISEN_L: -20.906,-33.834 -20.906,-34.322 -20.128,-35.1 -18.949,-35.1 -18.178,-35.872 -18.178,-37.836 -17.764,-38.25 -15.942,-38.25 -15.565,-37.873 -15.565,-33.777 -15.726,-33.616 -18.339,-33.616 -18.676,-33.776 -20.848,-33.776
  region net NetQ7_2: -10.785,-20.307 -10.785,-25.769 -13.587,-28.571 -13.587,-34.503 -12.974,-35.117 -7.573,-35.117 -7.082,-34.626 -7.082,-19.775 -7.491,-19.366 -10.299,-19.366 -10.785,-19.852
  region net PGND: 23.428,-28.574 23.442,-28.56 26.346,-28.56 26.787,-29.002 26.787,-31.159 26.389,-31.557 23.428,-31.557 23.428,-31.522
  region net ISEN_R: 14.961,-30.421 14.961,-31.259 14.977,-31.259 15.657,-31.939 19.214,-31.939 19.695,-32.42 21.934,-32.42 22.191,-32.162 22.191,-31.682 20.524,-30.015 20.524,-28.78 20.209,-28.464 18.393,-28.464 17.241,-29.617 15.674,-29.617 15.425,-29.866
  region net NetQ8_2: 6.407,-19.893 6.407,-35.639 6.8,-36.032 12.464,-36.032 12.936,-35.559 12.936,-28.536 10.001,-25.6 10.001,-20.161 9.438,-19.598 6.664,-19.598
  region net VBAT: -34.172,-19.213 -34.172,-26.068 -29.057,-26.068 -27.48,-24.491 -27.48,-20.685 -28.952,-19.213
  region net PGND: -12.342,-8.681 -12.342,-10.205 -11.707,-10.84 -7.431,-10.803 -6.989,-10.417 -6.989,-8.301 -7.431,-7.919 -11.58,-7.919
  region net GND: -27.051,41.275 -27.051,38.862 -26.416,38.227 -23.241,38.227 -22.733,38.735 -22.733,41.275
  region net GND: 21.971,41.91 21.971,39.497 22.606,38.862 25.781,38.862 26.289,39.37 26.289,41.91
  region net VBAT: -20.193,6.477 -19.304,6.477 -18.394,5.207 -17.399,5.207 -16.51,6.096 -16.51,7.366 -20.193,7.366
  region net VBAT: 14.224,5.969 14.605,6.35 15.983,6.35 16.383,7.112 17.526,7.112 17.907,6.731 17.907,5.08 14.224,5.08
  region net VBAT: 25.019,34.061 25.019,28.321 23.495,26.797 23.495,23.241 21.971,21.717 16.637,21.717 16.002,22.352 16.002,28.321 18.288,30.607 21.209,30.607 22.479,31.877 22.479,34.163 22.86,34.544 24.617,34.544
  region net VBAT: -25.908,34.671 -25.908,29.102 -25.019,28.213 -25.019,24.511 -24.003,23.495 -22.479,23.495 -21.463,24.511 -21.463,31.242 -22.987,32.766 -22.987,34.544 -25.781,34.544
  region net PGND: 11.557,-8.636 11.557,-10.668 11.165,-11.06 5.215,-11.06 4.963,-10.808 4.963,-8.374 5.197,-8.139 11.06,-8.139
  region net VBAT: 33.188,-19.121 33.188,-25.976 28.074,-25.976 26.496,-24.399 26.496,-20.593 27.968,-19.121
  region net R_HV: 28.448,25.019 28.448,12.192 26.035,9.779 26.035,3.302 28.448,0.889 28.448,-1.27 29.083,-1.905 31.877,-1.905 33.02,-0.762 33.02,2.921 33.401,3.302 33.401,25.448 32.56,26.162 29.591,26.162
  region net L_HV: -33.909,25.356 -33.909,-1.651 -31.623,-1.651 -30.607,-0.635 -30.607,1.778 -29.083,3.302 -27.235,3.302 -26.542,3.995 -26.542,9.397 -28.575,11.43 -28.575,24.981 -29.658,26.416 -32.689,26.416
  region net DGND: 5.537,-4.242 5.334,-4.445 5.334,-4.953 4.826,-5.461 4.826,-5.842 4.953,-5.969 6.223,-5.969 6.858,-5.334 6.604,-4.953
  region net DGND: 3.302,-2.54 4.191,-1.651 5.842,-1.651 5.842,-2.413 5.179,-2.413 4.191,-3.683 3.937,-3.683
  region net PGND: 24.892,5.334 20.574,5.334 20.574,3.175 24.892,3.175
  region net PGND: -25.357,6.858 -21.59,6.858 -21.59,10.287 -25.357,10.287
  region net NetD12_A: 26.924,0.381 26.924,-4.285 30.767,-8.128 32.623,-8.128 33.419,-8.923 33.419,-10.88 28.152,-10.88 23.495,-6.223 23.495,0.127 24.257,0.889 26.797,0.889
  region net NetD9_A: -29.21,0.508 -29.337,0.381 -29.337,-2.54 -34.437,-7.64 -34.437,-10.265 -34.034,-10.668 -30.353,-10.668 -26.416,-6.731 -26.416,0.508
Ground Plane:
  region net GND: 0.109,7.709 -0.349,7.251 -0.952,7.251 -1.415,7.714 -1.415,8.055 0.109,8.055
  region net DGND: 0.127,6.569 -0.331,7.027 -0.934,7.027 -1.397,6.564 -1.397,6.223 0.127,6.223
Bottom:
  region net VBAT: -13.589,11.684 -12.573,12.7 -9.779,12.7 -9.244,12.165 -9.244,10.16 -11.176,10.16 -11.938,9.398 -13.462,9.398 -13.589,9.525
  region net VBAT: 23.495,26.416 22.352,27.559 16.002,27.559 16.002,21.336 16.764,20.574 22.733,20.574 23.495,21.336
  region net 3V3: 2.626,-1.356 2.966,-1.016 3.175,-1.016 3.556,-0.635 3.556,1.016 4.191,1.016 4.572,0.635 4.572,-0.254 4.699,-0.381 4.699,-1.27 3.937,-2.032 2.794,-2.032
  region net 3V3: 3.048,-1.778 3.048,-2.032 3.048,-2.413 3.81,-2.413 4.064,-2.159 4.064,-1.778

## Silkscreen, mask and mechanical layers (free items; w line width, h text height)
Top Overlay:
  drawing of 410 lines, arcs and shapes, not listed
  text "VBAT_TP" at 30.999,36.868 h1.1 r270
  text "<- TOOLING_HOLE_2" at -34.735,31.902 h1 r90
  text "high performance" at -13.998,13.932 h2.5
  text "rev2.0" at 5.448,9.364 h2.5
  text "DC-CDI" at -16.076,9.354 h7.5
  text "FULLY PROGRAMMABLE" at -14.207,7.078 h3
  text "R_GATE_TP" at 19.072,3.716 h1 r270
  text "L_GATE_TP" at -23.517,-3.335 h1 r90
  text "HV_r_TP" at 34.268,-3.843 h1 r90
  text "HV_L_TP" at -34.82,-3.97 h1 r90
  text "3V3_TP" at -0.486,-17.014 h1 r270
  text "DGND_TP" at -4.614,-26.607 h1 r90
  text "TOOLING_HOLE_1 ->" at 34.058,-27.44 h1 r270
Bottom Overlay:
  drawing of 411 lines, arcs and shapes, not listed
  text "warning! / high  / voltage" at 7.008,37.211 h2
  text "@andrealanzolla" at -34.887,14.817 h1.1 r270
  text "DEBUG" at 30.673,-7.223 h2
Mechanical 1:
  the board outline again, w0.1

## Text inside footprints (layer, text, board x,y; h text height)
J2: Top 3D Body "PCB EDGE" at -19.547,42.429 h0.81 r180